# Altium PCB PCB.PcbDoc
Units mm, origin at the board's own origin, x right, y up, seen from the top; angles counter-clockwise.
Board outline 50.42 x 71.12 mm, 2 copper layers (Top Layer, Bottom Layer); 27 components, 57 nets, 214 pads, 39 vias.
Unrouted connection lines stored in the file: 4.
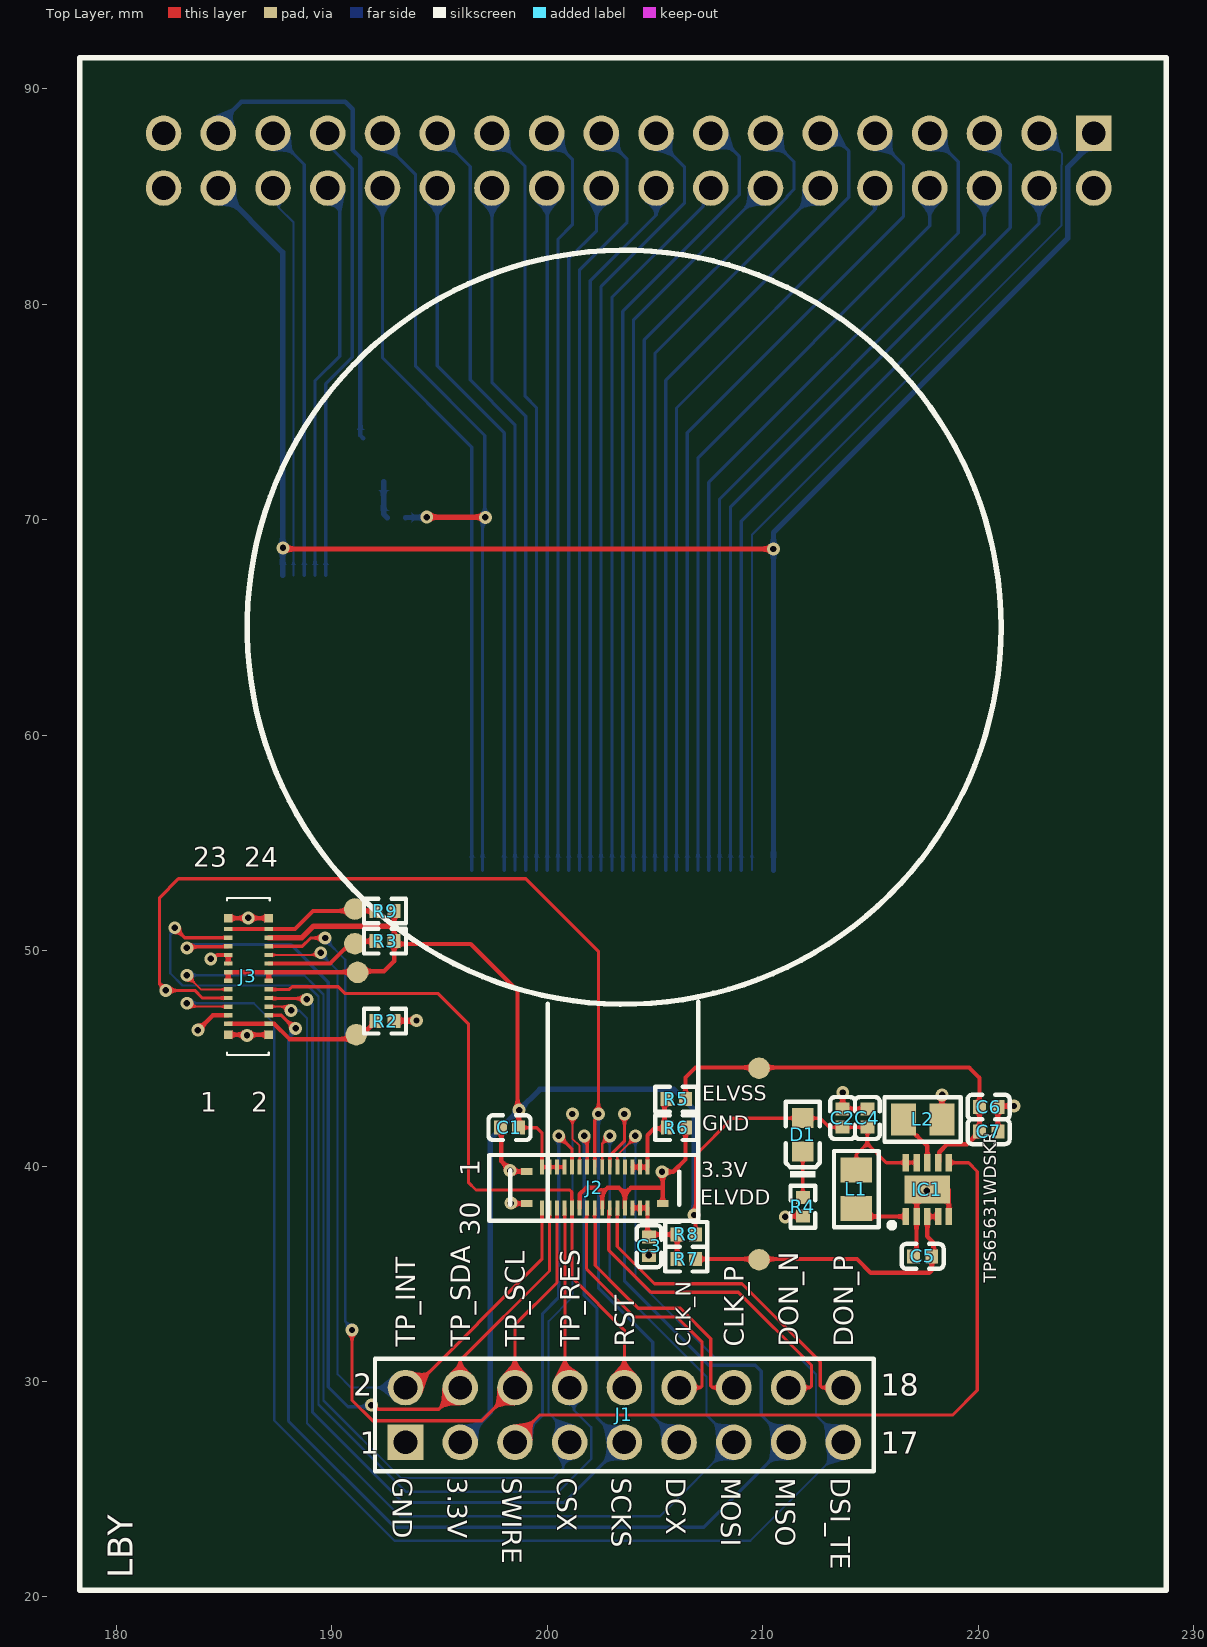
[diagram p0: Top Layer view]
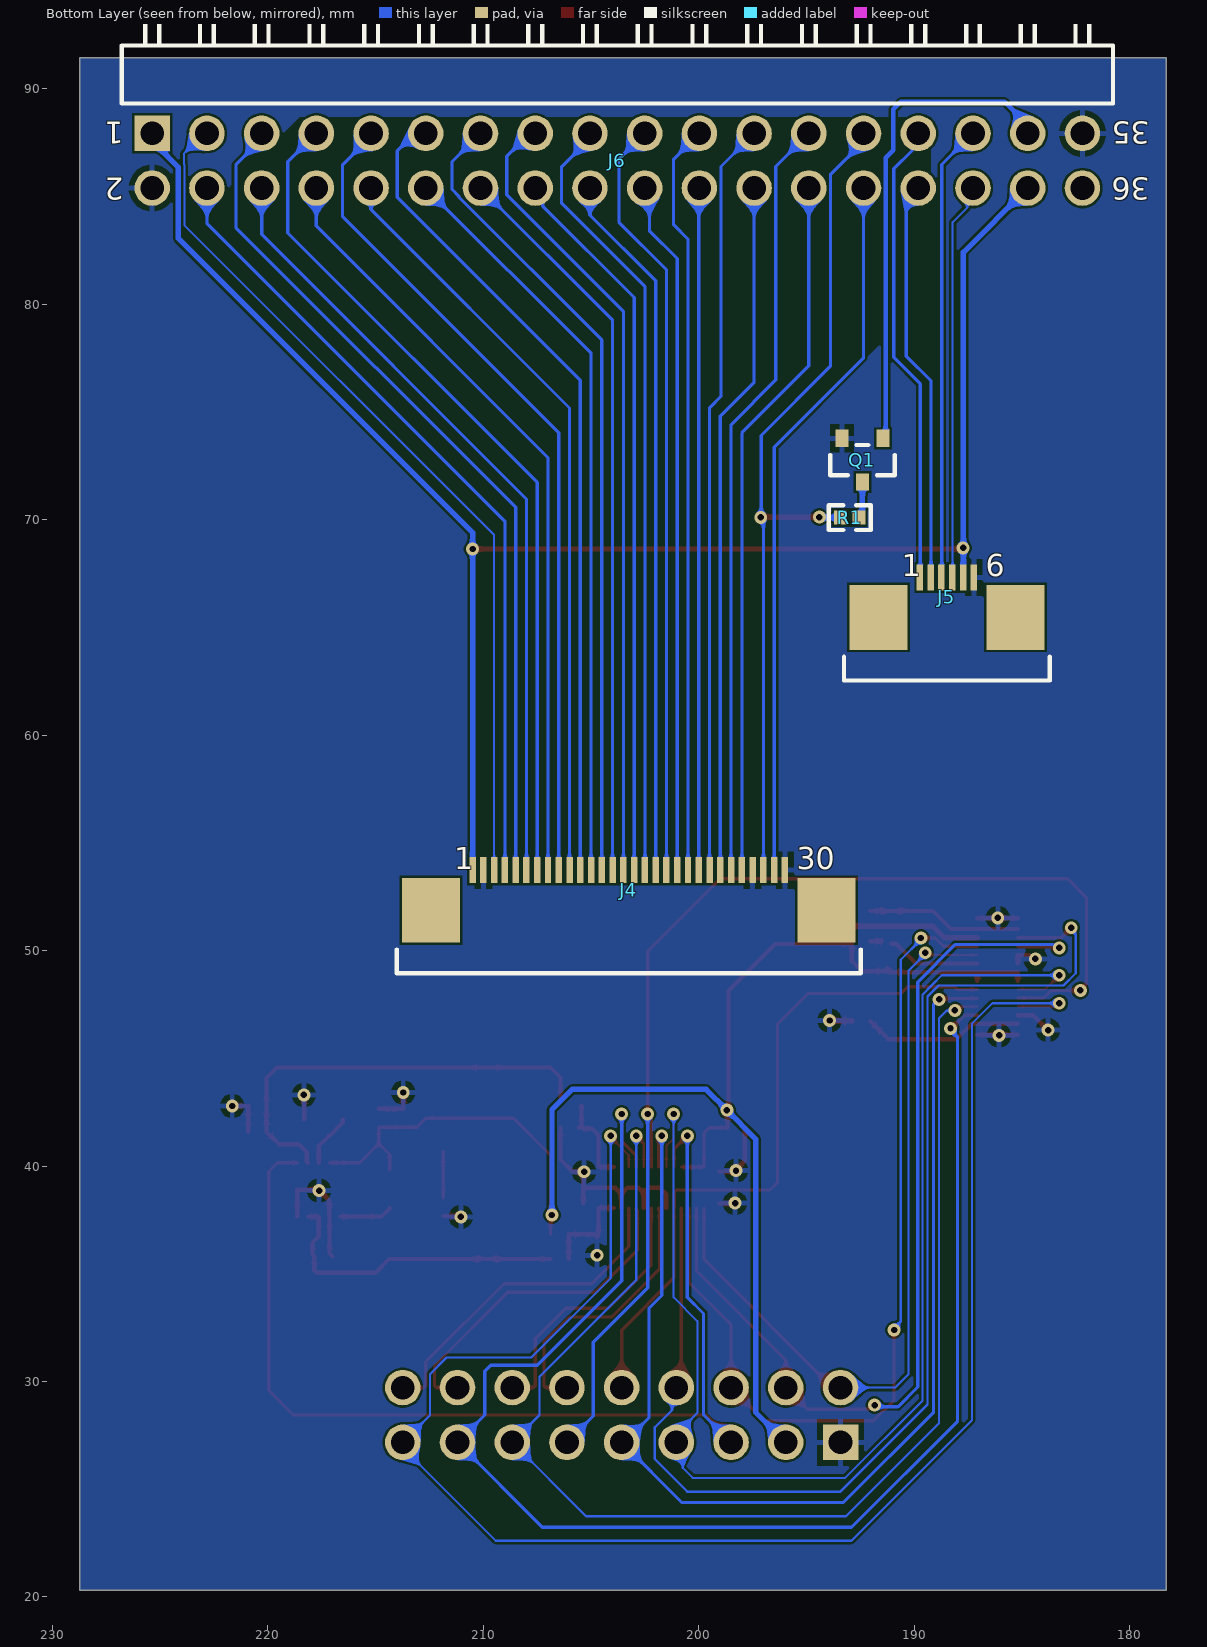
[diagram p1: Bottom Layer view, seen from below]
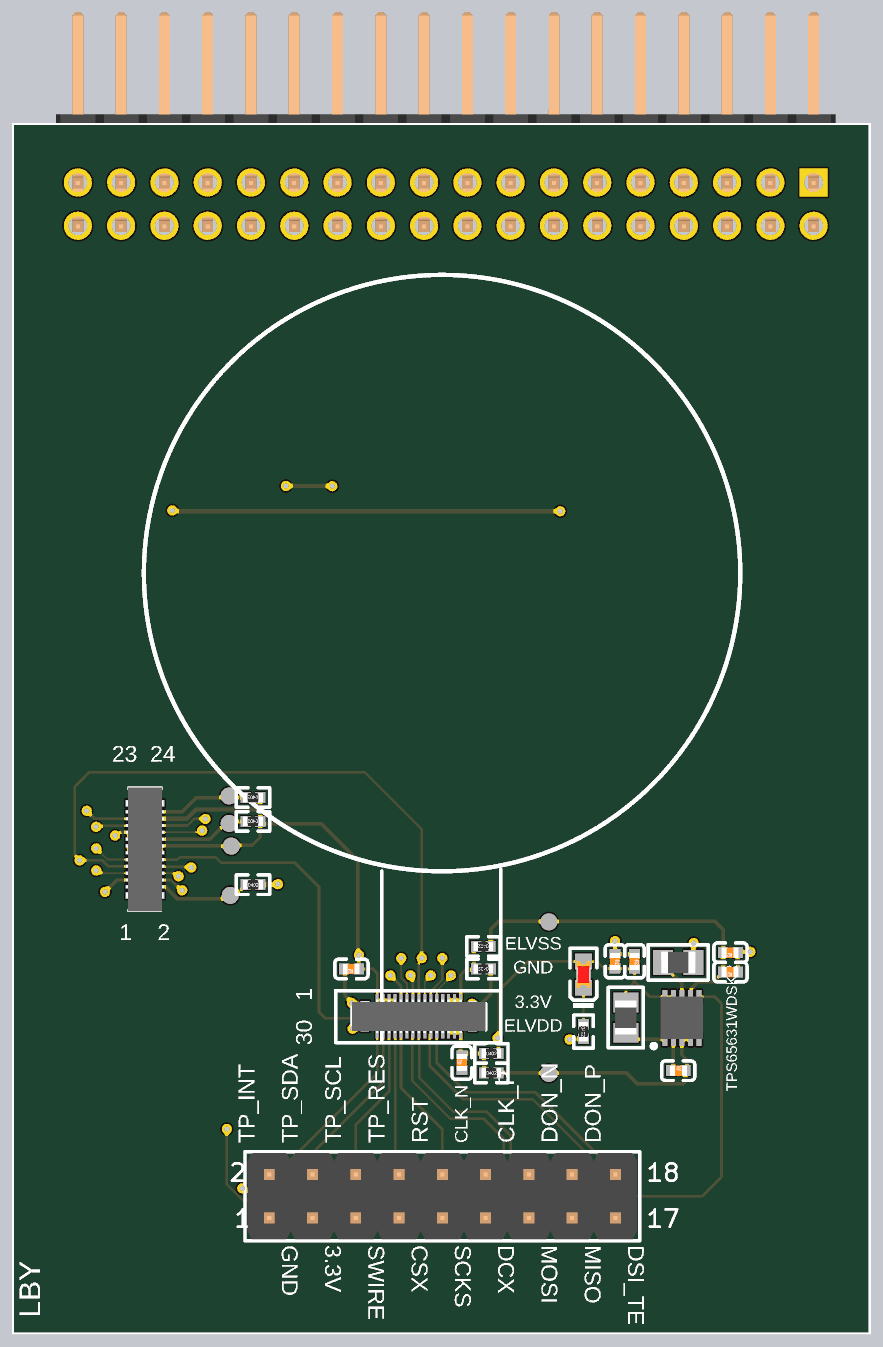
[diagram p2: 3D render of the assembled board from above, using the file's embedded part models]
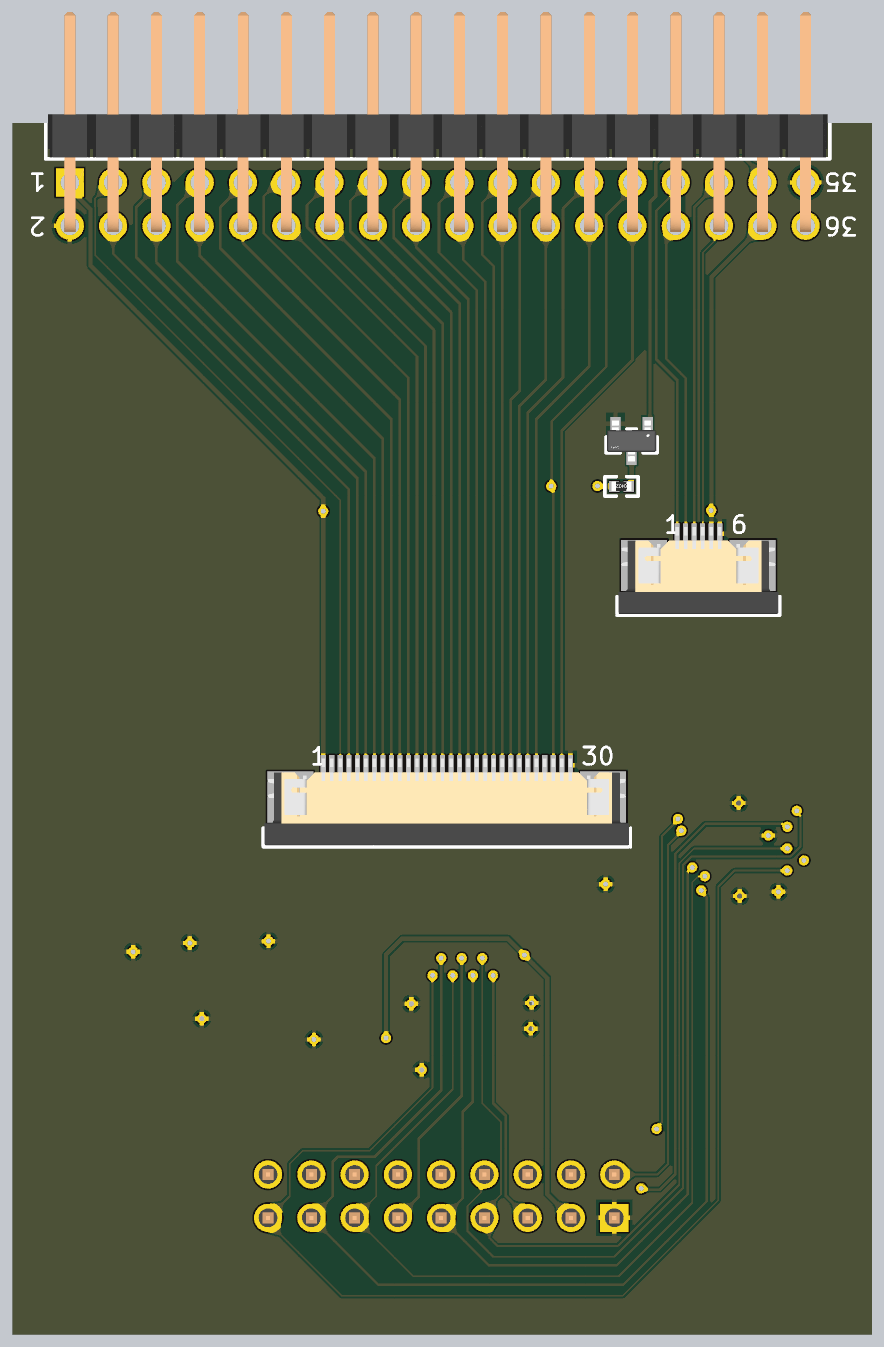
[diagram p3: 3D render of the assembled board from below, using the file's embedded part models]

## Layer stack, top to bottom
Top Solder: solder mask 0.0102, Solder Resist, Dk 3.5
Top Layer: signal copper 0.0356
Dielectric 1: dielectric 0.32, FR-4, Dk 4.8
Bottom Layer: signal copper 0.0356
Bottom Solder: solder mask 0.0102, Solder Resist, Dk 3.5

## Board outline
178.308,20.32 178.308,91.44 228.727,91.44 228.727,20.32

## Design rules (kind name [scope] priority, off if disabled: settings)
Clearance [All] p1: gap=0.102 ignorepadtopadclearanceinfootprint=FALSE
DiffPairsRouting DiffPair_DiffPairsRouting [InDifferentialPairClass('New Class')] p1: maxlimit=0.4 minlimit=0.1 mostfreqgap=0.254 toplayer_minwidth=0.15 toplayer_maxwidth=0.15 toplayer_prefwidth=0.15 bottomlayer_minwidth=0.15 bottomlayer_maxwidth=0.15 bottomlayer_prefwidth=0.15 maxuncoupledlength=12.7
DiffPairsRouting DiffPair_DiffPairsRouting_1 [InDifferentialPairClass('New Class')] p2: maxlimit=0.4 minlimit=0.15 mostfreqgap=0.254 toplayer_minwidth=0.381 toplayer_maxwidth=0.381 toplayer_prefwidth=0.381 bottomlayer_minwidth=0.381 bottomlayer_maxwidth=0.381 bottomlayer_prefwidth=0.381 maxuncoupledlength=12.7
DiffPairsRouting DiffPair_DiffPairsRouting_2 [InDifferentialPairClass('New Class')] p3: maxlimit=0.254 minlimit=0.254 mostfreqgap=0.254 toplayer_minwidth=0.15 toplayer_maxwidth=0.15 toplayer_prefwidth=0.15 bottomlayer_minwidth=0.15 bottomlayer_maxwidth=0.15 bottomlayer_prefwidth=0.15 maxuncoupledlength=12.7
DiffPairsRouting DiffPair_DiffPairsRouting_3 [InDifferentialPairClass('New Class')] p4: maxlimit=0.254 minlimit=0.254 mostfreqgap=0.254 toplayer_minwidth=0.1 toplayer_maxwidth=0.381 toplayer_prefwidth=0.15 bottomlayer_minwidth=0.1 bottomlayer_maxwidth=0.381 bottomlayer_prefwidth=0.15 maxuncoupledlength=12.7
DiffPairsRouting DiffPair_DiffPairsRouting_4 [InDifferentialPairClass('New Class')] p5: maxlimit=0.254 minlimit=0.254 mostfreqgap=0.254 toplayer_minwidth=0.381 toplayer_maxwidth=0.381 toplayer_prefwidth=0.381 bottomlayer_minwidth=0.381 bottomlayer_maxwidth=0.381 bottomlayer_prefwidth=0.381 maxuncoupledlength=12.7
DiffPairsRouting [All] p6: maxlimit=0.254 minlimit=0.254 mostfreqgap=0.254 toplayer_minwidth=0.381 toplayer_maxwidth=0.381 toplayer_prefwidth=0.381 bottomlayer_minwidth=0.381 bottomlayer_maxwidth=0.381 bottomlayer_prefwidth=0.381 maxuncoupledlength=12.7
MatchedLengths DiffPair_MatchedLengths [InDifferentialPairClass('New Class')] p1: tolerance=25.4 checknetsindiffpair=FALSE checkdiffpairvsdiffpair=TRUE checkxsignals=TRUE checkothers=TRUE
MatchedLengths DiffPair_MatchedLengths_1 [InDifferentialPairClass('New Class')] p2: tolerance=25.4 checknetsindiffpair=FALSE checkdiffpairvsdiffpair=TRUE checkxsignals=TRUE checkothers=TRUE
MatchedLengths DiffPair_MatchedLengths_2 [InDifferentialPairClass('New Class')] p3: tolerance=25.4 checknetsindiffpair=FALSE checkdiffpairvsdiffpair=TRUE checkxsignals=TRUE checkothers=TRUE
MatchedLengths DiffPair_MatchedLengths_3 [InDifferentialPairClass('New Class')] p4: tolerance=25.4 checknetsindiffpair=FALSE checkdiffpairvsdiffpair=TRUE checkxsignals=TRUE checkothers=TRUE
MatchedLengths DiffPair_MatchedLengths_4 [InDifferentialPairClass('New Class')] p5: tolerance=25.4 checknetsindiffpair=FALSE checkdiffpairvsdiffpair=TRUE checkxsignals=TRUE checkothers=TRUE
PolygonConnect [All] p1: connectstyle=Relief reliefconductorwidth=0.254 reliefentries=4 polygonreliefangle="90 Angle" airgapwidth=0.254
RoutingVias [All] p1: holewidth=0.711 width=1.27 viastyle="Through Hole" minholewidth=0.711 minwidth=1.27 maxholewidth=0.711 maxwidth=1.27
SolderMaskExpansion [All] p1: expansion=0.102 istentingtop=FALSE
Width [All] p1: maxlimit=0.254 minlimit=0.1 preferedwidth=0.254
29 further rules are at their usual default settings.

## Classes and differential pairs
component class MIAN: C1 C2 C3 C4 C5 C6 C7 D1 IC1 J1 J2 J3 J4 J5 L1 L2 Q1 R1 R3 R4 R5 R6 R7 R8 R9
differential pair DON: +DON_P -DON_N
differential pair CLK: +CLK_P -CLK_N

## Components (designator, comment, footprint, x,y, rotation, side; value= is the part's Value field where it differs from the comment)
C1 "100nF" 0402_C 198.247,41.783 r180 top value=100pF
C2 "10uF" 0402_C 213.714,42.231 r270 top
C3 "100nF" 0402_C 204.724,36.278 r90 top value=100pF
C4 "10uF" 0402_C 214.857,42.231 r270 top
C5 "10uF" 0402_C 217.424,35.814 r0 top
C6 "10uF" 0402_C 220.489,42.739 r180 top
C7 "10uF" 0402_C 220.489,41.596 r180 top
D1 "红灯 0603" 0603_LED_S1 211.863,41.454 r90 top
IC1 "TPS65631WDSKR" SON50P250X250X80-11N-D 217.643,38.909 r90 top
J1 "61301821121" 61301821121 203.581,28.448 r0 top locked
J2 "BM28B0.6-30DS_2-0.35V_53_" BM28B0630DS2035V53 202.331,39.006 r0 top
J3 "BM14B_0.8_-24DS-0.4V_53_" BM14B0824DS04V53 186.131,48.803 r90 top
J4 "68713014522" 68713014522 203.251,51.177 r180 bottom
J5 "68710614522" 68710614522 188.485,64.767 r180 bottom
J6 "61303621021" 61303621021 203.782,90.668 r0 bottom
L1 "10uH ±10%" 0805_L 214.349,38.929 r90 top
L2 "10uH ±10%" 0805_L 217.424,42.164 r0 top
Q1 "SS8050-G" FP-SS8050-G-MFG 192.405,72.771 r270 bottom
R1 "0Ω (0R0) ±1%" 0402_R 192.996,70.104 r0 bottom
R2 "0Ω (0R0) ±1%" 0402_R 192.471,46.73 r0 top
R3 "0Ω (0R0) ±1%" 0402_R 192.471,50.444 r180 top
R4 "0Ω (0R0) ±1%" 0402_R 211.863,38.108 r270 top
R5 "0Ω (0R0) ±1%" 0402_R 205.99,43.104 r180 top
R6 "0Ω (0R0) ±1%" 0402_R 205.994,41.783 r180 top
R7 "0Ω (0R0) ±1%" 0402_R 206.458,35.687 r0 top
R8 "0Ω (0R0) ±1%" 0402_R 206.458,36.83 r0 top
R9 "0Ω (0R0) ±1%" 0402_R 192.471,51.841 r180 top

## Footprints (in the part's own frame and the unit in brackets; to place one, negate y for a bottom-side part, rotate by r counter-clockwise, add the part's x,y. Pads: shape width x height; smd on the part's side, far side on the other; paste and mask are expansions set on the pad)
0402_C [mm]
  rect 0.6x0.65 smd mask+0.051: 1(-0.425,0) 2(0.425,0)
  silkscreen extent -0.97,-0.58 0.98,0.58, body extent -0.48,-0.3 0.52,0.3, height 0.2
0402_R [mm]
  rect 0.6x0.65 smd mask+0.051: 1(-0.425,0) 2(0.425,0)
  silkscreen extent -0.98,-0.58 0.98,0.57, body extent -0.58,-0.27 0.57,0.28, height 0.41
0603_LED_S1 [mm]
  rect 0.93x0.98 smd: A(0.77,0) K(-0.77,0)
  silkscreen extent -1.98,-0.79 1.54,0.79, body extent -0.8,-0.4 0.8,0.4, height 0.6
0805_L [mm]
  rect 1.16x1.47 smd: 1(-0.89,0) 2(0.89,0)
  silkscreen extent -1.77,-1.03 1.77,1.04, body extent -1.02,-0.64 1.03,0.64, height 0.6
61301821121 [mm] "Pin Header, pitch 2.54 mm, THT, Vertical, dual row, 18p"
  rect 1.65x1.65 hole 1.1: 1(-10.16,-1.27)
  round 1.65 hole 1.1: 2(-10.16,1.27) 3(-7.62,-1.27) 4(-7.62,1.27) 5(-5.08,-1.27) 6(-5.08,1.27) 7(-2.54,-1.27) 8(-2.54,1.27) 9(0,-1.27) 10(0,1.27) 11(2.54,-1.27) 12(2.54,1.27) 13(5.08,-1.27) 14(5.08,1.27) 15(7.62,-1.27) 16(7.62,1.27) 17(10.16,-1.27) 18(10.16,1.27)
  silkscreen extent -11.58,-2.62 11.58,2.62, body extent -11.43,-2.54 11.43,2.54, height 8.59
61303621021 [mm] "Pin Header, pitch 2.54 mm, THT, Angled, dual row, 36p"
  rect 1.65x1.65 hole 1.1: 1(21.59,2.73)
  round 1.65 hole 1.1: 2(21.59,5.27) 3(19.05,2.73) 4(19.05,5.27) 5(16.51,2.73) 6(16.51,5.27) 7(13.97,2.73) 8(13.97,5.27) 9(11.43,2.73) 10(11.43,5.27) 11(8.89,2.73) 12(8.89,5.27) 13(6.35,2.73) 14(6.35,5.27) 15(3.81,2.73) 16(3.81,5.27) 17(1.27,2.73) 18(1.27,5.27) 19(-1.27,2.73) 20(-1.27,5.27) 21(-3.81,2.73) 22(-3.81,5.27) 23(-6.35,2.73) 24(-6.35,5.27) 25(-8.89,2.73) 26(-8.89,5.27) 27(-11.43,2.73) 28(-11.43,5.27) 29(-13.97,2.73) 30(-13.97,5.27) 31(-16.51,2.73) 32(-16.51,5.27) 33(-19.05,2.73) 34(-19.05,5.27) 35(-21.59,2.73) 36(-21.59,5.27)
  silkscreen extent -23.01,-7.27 23.01,1.35, body extent -22.86,-7.27 22.86,5.63, height 5.12
68710614522 [mm] "ZIF Connectors, Horizontal, Bottom Contact, pitch 0.5mm, 6p"
  rect 0.3x1.2 smd: 1(-1.25,2.56) 2(-0.75,2.56) 3(-0.25,2.56) 4(0.25,2.56) 5(0.75,2.56) 6(1.25,2.56)
  rect 2.7x3 smd: MP1(-3.18,0.7) MP2(3.18,0.7)
  silkscreen extent -4.77,-2.22 4.77,-1.12, body extent -4.7,-2.15 4.7,2.95, height 2.1
68713014522 [mm] "ZIF Connectors, Horizontal, Bottom Contact, pitch 0.5mm, 30p"
  rect 0.3x1.2 smd: 1(-7.25,2.56) 2(-6.75,2.56) 3(-6.25,2.56) 4(-5.75,2.56) 5(-5.25,2.56) 6(-4.75,2.56) 7(-4.25,2.56) 8(-3.75,2.56) 9(-3.25,2.56) 10(-2.75,2.56) 11(-2.25,2.56) 12(-1.75,2.56) 13(-1.25,2.56) 14(-0.75,2.56) 15(-0.25,2.56) 16(0.25,2.56) 17(0.75,2.56) 18(1.25,2.56) 19(1.75,2.56) 20(2.25,2.56) 21(2.75,2.56) 22(3.25,2.56) 23(3.75,2.56) 24(4.25,2.56) 25(4.75,2.56) 26(5.25,2.56) 27(5.75,2.56) 28(6.25,2.56) 29(6.75,2.56) 30(7.25,2.56)
  rect 2.7x3 smd: MP1(-9.18,0.7) MP2(9.18,0.7)
  silkscreen extent -10.77,-2.22 10.78,-1.12, body extent -10.7,-2.15 10.7,2.95, height 2.1
BM14B0824DS04V53 [mm]
  rect 0.2x0.4 smd: 1(-2.2,0.94) 2(-2.2,-0.94) 3(-1.8,0.94) 4(-1.8,-0.94) 5(-1.4,0.94) 6(-1.4,-0.94) 7(-1,0.94) 8(-1,-0.94) 9(-0.6,0.94) 10(-0.6,-0.94) 11(-0.2,0.94) 12(-0.2,-0.94) 13(0.2,0.94) 14(0.2,-0.94) 15(0.6,0.94) 16(0.6,-0.94) 17(1,0.94) 18(1,-0.94) 19(1.4,0.94) 20(1.4,-0.94) 21(1.8,0.94) 22(1.8,-0.94) 23(2.2,0.94) 24(2.2,-0.94)
  rect 0.41x0.4 smd: MP1(-2.705,0.94) MP2(-2.705,-0.94) MP3(2.705,-0.94) MP4(2.705,0.94)
  silkscreen extent -3.64,-0.99 3.64,0.99, body extent -3.64,-1.12 3.64,1.12, height 0.9
BM28B0630DS2035V53 [mm]
  rect 0.18x0.7 smd: 1(-2.577,0.95) 2(-2.577,-0.95) 3(-2.227,0.95) 4(-2.227,-0.95) 5(-1.877,0.95) 6(-1.877,-0.95) 7(-1.527,0.95) 8(-1.527,-0.95) 9(-1.177,0.95) 10(-1.177,-0.95) 11(-0.827,0.95) 12(-0.827,-0.95) 13(-0.477,0.95) 14(-0.477,-0.95) 15(-0.127,0.95) 16(-0.127,-0.95) 17(0.223,0.95) 18(0.223,-0.95) 19(0.573,0.95) 20(0.573,-0.95) 21(0.923,0.95) 22(0.923,-0.95) 23(1.273,0.95) 24(1.273,-0.95) 25(1.623,0.95) 26(1.623,-0.95) 27(1.973,0.95) 28(1.973,-0.95) 29(2.323,0.95) 30(2.323,-0.95)
  rect 0.53x0.31 smd: MP1(-3.282,0.745) MP2(-3.282,-0.745) MP3(3.028,-0.745) MP4(3.028,0.745)
  silkscreen extent -4.05,-0.8 3.8,0.79, body extent -4.05,-0.98 3.8,0.98, height 0.7
FP-SS8050-G-MFG [mm]
  rect 0.8x0.6 smd paste+0 mask+0: 1(-1.01,0.95) 2(-1.01,-0.95) 3(1.01,0)
  silkscreen extent -0.7,-1.5 0.7,1.5, body extent -1.21,-1.45 1.21,1.45, height 1.15
SON50P250X250X80-11N-D [mm]
  rect 0.8x0.3 smd: 1(-1.25,1) 2(-1.25,0.5) 3(-1.25,0) 4(-1.25,-0.5) 5(-1.25,-1) 6(1.25,-1) 7(1.25,-0.5) 8(1.25,0) 9(1.25,0.5) 10(1.25,1)
  rect 1.3x2.1 smd: 11(0,0)
  silkscreen extent -1.77,1.53 -1.53,1.77, body extent -1.25,-1.25 1.25,1.25, height 0.77

## Part data
C1 C3: library part CAP, "Capacitor", Published=8-Jun-2000, Publisher="Altium Limited", Revision="July-2002: Re-released for DXP Platform."
C2 C4 C5 C6 C7: library part "0402 10uF (106) 20% 6.3V", "贴片电容", Package=0402, SuppliersPartNumber=C15525, ComponentLink1Description=供应商链接, ComponentLink1URL=http://www.szlcsc.com/product/details_16204.html, Supplier=LC
D1: library part "0603 红灯", "发光二极管", Package=0603, SuppliersPartNumber=C2286, ComponentLink1Description=供应商链接, ComponentLink1URL=http://www.szlcsc.com/product/details_2659.html, Supplier=LC
IC1: "Integrated Circuit", Manufacturer_Name="Texas Instruments", Mouser Part Number=595-TPS65631WDSKR, Arrow Part Number=TPS65631WDSKR, Arrow Price/Stock=https://www.arrow.com/en/products/tps65631wdskr/texas-instruments, Datasheet Link=http://www.ti.com/lit/gpn/tps65631w, Height=0.8mm, Manufacturer_Part_Number=TPS65631WDSKR, Mouser Price/Stock=https://www.mouser.co.uk/ProductDetail/Texas-Instruments/TPS65631WDSKR?qs=6E8igxPflKf9wUn%252Bq%252B8X1Q%3D%3D
J1: library part CMP-1502-01101-1, "THT Vertical Pin Header WR-PHD, Pitch 2.54 mm, Dual Row, 18 pins", Contact Resistance=20mOhm, Manufacturer="Wurth Elektronik", Operating Temperature=-40to105degC, Rated Current=3A, Withstanding Voltage=500VAC, Working Voltage=250VAC, Datasheet URL=https://katalog.we-online.de/em/datasheet/6130xx21121.pdf, Gender=Male, Manufacturer URL=http://www.we-online.de, Mounting Technology=THT, Orientation=Vertical, Package Reference=61301821121, Packaging=Bag, PART NUMBER=61301821121, Pin Number=18, Pitch=2.54mm, Publisher=WurthElektronik, Row Number=Dual
J2: "Connector", Manufacturer_Name=Hirose, Manufacturer_Part_Number=BM28B0.6-30DS/2-0.35V(53), Mouser Part Number=798-28B0630DS2035V53, Datasheet Link=https://datasheet.datasheetarchive.com/originals/distributors/DKDS-30/589689.pdf, Height=0.6mm, Mouser Price/Stock=https://www.mouser.co.uk/ProductDetail/Hirose-Connector/BM28B06-30DS-2-035V53?qs=1mbolxNpo8dyGYNDVauvGQ%3D%3D
J3: "Connector", Arrow Part Number=BM14B(0.8)-24DS-0.4V(53), Manufacturer_Name=Hirose, Mouser Part Number=798-BM14B0824DS04V53, Arrow Price/Stock=https://www.arrow.com/en/products/bm14b-0.8-24ds-0.4v-53/hirose-electric, Datasheet Link=https://www.arrow.com/en/products/bm14b-0.8-24ds-0.4v-53/hirose-electric, Height=0.8mm, Manufacturer_Part_Number=BM14B(0.8)-24DS-0.4V(53), Mouser Price/Stock=https://www.mouser.co.uk/ProductDetail/Hirose-Connector/BM14B08-24DS-04V53?qs=QRVci0nWsCaR3TeKMbLD%252Bw%3D%3D
J4: library part CMP-1502-01540-1, "SMT ZIF Connectors WR-FPC, Horizontal, Bottom Contact, pitch 0.5 mm, 30 pins", Contact Resistance=20mOhm, Manufacturer="Wurth Elektronik", Operating Temperature=-25to85degC, Rated Current=0.5A, Withstanding Voltage=250VAC, Working Voltage=50VAC, Contact Design=BottomContact, Datasheet URL=https://katalog.we-online.de/em/datasheet/68713014522.pdf, Manufacturer URL=http://www.we-online.de, Mounting Technology=SMT, Orientation=Horizontal, Package Reference=68713014522, Packaging=TapeandReel, PART NUMBER=68713014522, Pin Number=30, Pitch=0.5mm, Publisher=WurthElektronik
J5: library part CMP-1502-01527-1, "SMT ZIF Connectors WR-FPC, Horizontal, Bottom Contact, pitch 0.5 mm, 6 pins", Contact Resistance=20mOhm, Manufacturer="Wurth Elektronik", Operating Temperature=-25to85degC, Rated Current=0.5A, Withstanding Voltage=250VAC, Working Voltage=50VAC, Contact Design=BottomContact, Datasheet URL=https://katalog.we-online.de/em/datasheet/68710614522.pdf, Manufacturer URL=http://www.we-online.de, Mounting Technology=SMT, Orientation=Horizontal, Package Reference=68710614522, Packaging=TapeandReel, PART NUMBER=68710614522, Pin Number=6, Pitch=0.5mm, Publisher=WurthElektronik
J6: library part CMP-1502-01130-1, "THT Angled Pin Header WR-PHD, Pitch 2.54 mm, Dual Row, 36 pins", Contact Resistance=20mOhm, Manufacturer="Wurth Elektronik", Operating Temperature=-40to105degC, Rated Current=3A, Withstanding Voltage=500VAC, Working Voltage=250VAC, Datasheet URL=https://katalog.we-online.de/em/datasheet/6130xx21021.pdf, Gender=Male, Manufacturer URL=http://www.we-online.de, Mounting Technology=THT, Orientation=Angled, Package Reference=61303621021, Packaging=Bag, PART NUMBER=61303621021, Pin Number=36, Pitch=2.54mm, Publisher=WurthElektronik, Row Number=Dual
L1 L2: library part "0805 10uH 10%", "贴片电感", Package=0805, SuppliersPartNumber=C1046, ComponentLink1Description=供应商链接, ComponentLink1URL=http://www.szlcsc.com/product/details_1398.html, Supplier=LC
Q1: library part CMP-20235-000001-1, "NPN TRANSISTOR 1.5A 40V SOT-23 R", Case/Package=TO-236-3, Collector Emitter Breakdown Voltage=25V, Collector Emitter Voltage (VCEO)=400mV, Max Collector Current=1.5A, Max Power Dissipation=300mW, Transition Frequency=100MHz, Max Breakdown Voltage=25V, Mount="Surface Mount", Packaging="Tape and Reel", RoHS Compliant=Yes
R1 R2 R3 R4 R5 R6 R7 R8 R9: library part "0402 0Ω (0R0) 1%", "贴片电阻", Package=0402, SuppliersPartNumber=C17168, ComponentLink1Description=供应商链接, ComponentLink1URL=http://www.szlcsc.com/product/details_17853.html, Supplier=LC

## Free pads (board coordinates)
  round 1 smd: 1(191.067,51.934) 1(191.071,50.325) 1(191.135,46.101) 1(191.198,48.993) 1(209.833,35.656) 1(209.833,44.546)

## Via types
v1: diameter 0.6, hole 0.3, Top Layer to Bottom Layer, 39 vias

## Nets (pads, with @x,y where several pads share a name; then routed paths per layer and width w, separated by ;. In a path a pad name is that pad's centre, name@x,y a point inside that pad or via, vN(x,y) a via of type N, cw(c..) or ccw(c..) an arc to the next point about the centre after c; other vN are vias at no path point)
3V3: C1.1 C2.2 C4.2 D1.A IC1.9 IC1.10 J1.3 J2.1 J2.3 J2.5 J2.7 J3.11 J3.12 J3.13 J3.14 J3.22 L1.2 pad.1@191.198,48.993 R3.1 R8.2 R9.1 | length 81.9
  Top Layer w0.15: C1.1 199.517,41.783 199.754,41.546 J2.1 J2.7 ; R8.2 206.883,40.513 208.594,42.224 D1.A 212.665,42.224 213.083,41.806 C2.2 C4.2 214.857,41.048 ; L1.2 214.349,40.54 214.857,41.048 ; IC1.9 IC1.10 215.746,40.159 214.857,41.048
  Top Layer w0.2: J3.11 J3.13 186.971,49.003 J3.14 ; J3.12 J3.14 ; pad.1@191.156,49.146 191.18,49.003 J3.14 ; pad.1@191.198,48.993 191.252,49.047 192.427,49.047 192.896,49.516 R3.1@192.896,50.309 ; pad.1@191.24,49.16 191.258,49.177 pad.1@191.32,49.115 ; R9.1 192.896,51.143 R3.1 R3.1@192.896,50.309 ; C1.1 198.672,42.596 198.619,42.649 198.619,48.142 196.452,50.309 R3.1@192.896,50.309
  Top Layer w0.25: J3.22 188.61,50.603 189.149,51.143 192.896,51.143
  Bottom Layer w0.25: J1.3 197.358,28.575 197.358,41.259 v1(198.696,42.596) 199.66,43.561 205.878,43.561 206.816,42.623 v1(206.816,37.731)
BL_CTR: J6.33 Q1.1 | length 22.7
  Bottom Layer w0.2: J6.33 184.732,88.339 185.801,89.408 190.627,89.408 190.976,89.059 190.976,87.154 191.325,86.805 191.325,73.911 Q1.1
CLK_N: J1.12 J2.14 | length 12.7
  Top Layer w0.15: J2.14 201.854,37.949 201.827,37.922 201.827,35.219 202.914,34.131 204.049,32.997 206.017,32.997 207.189,31.825 207.189,29.806 207.101,29.718 J1.12
CLK_P: J1.14 J2.16 | length 12.7
  Top Layer w0.15: J2.16 202.204,37.468 202.231,37.441 202.231,35.386 203.486,34.131 204.216,33.401 206.184,33.401 207.593,31.992 207.593,29.806 207.681,29.718 J1.14
CSX: J1.7 J2.11 J3.9 J4.3 J6.3 | length 101.3
  Top Layer w0.1: v1@183.348,48.858 v1(183.269,48.858) 183.923,48.203 J3.9 ; v1(201.168,42.418) 201.168,41.275 201.504,40.939 J2.11
  Bottom Layer w0.1: v1(183.269,48.858) 188.722,48.858 189.199,48.38 189.611,47.969 189.611,29.124 193.208,25.527 200.279,25.527 200.744,25.992 200.744,27.262 201.041,27.559 200.064,28.536 200.064,32.805 201.168,33.909 v1(201.168,42.418) ; J4.3 209.501,69.293 223.878,83.67 223.878,86.475 223.901,86.497 223.901,86.995 222.958,87.938 J6.3
D0: J4.6 J6.6 | length 36.8
  Bottom Layer w0.15: J4.6 208.001,70.968 220.292,83.259 J6.6
D1: J4.7 J6.7 | length 39.5
  Bottom Layer w0.15: J4.7 207.501,71.738 219.075,83.312 219.075,86.615 J6.7
D2: J4.8 J6.8 | length 36.1
  Bottom Layer w0.15: J4.8 207.001,72.889 217.752,83.64 J6.8
D3: J4.9 J6.9 | length 38.9
  Bottom Layer w0.15: J4.9 206.501,74.04 216.535,84.074 216.535,86.487 215.212,87.81 J6.9
D4: J4.10 J6.10 | length 35.5
  Bottom Layer w0.15: J4.10 206.001,75.191 215.212,84.402 J6.10
D5: J4.11 J6.11 | length 38.6
  Bottom Layer w0.15: J4.11 205.501,76.469 213.995,84.963 213.995,87.122 213.179,87.938 J6.11
D6: J4.12 J6.12 | length 34.8
  Bottom Layer w0.15: J4.12 205.001,77.727 J6.12
D7: J4.13 J6.13 | length 37.6
  Bottom Layer w0.15: J4.13 204.501,78.35 211.134,84.983 211.134,85.023 211.455,85.344 211.455,86.615 J6.13
D8: J4.14 J6.14 | length 34.2
  Bottom Layer w0.15: J4.14 204.001,79.267 J6.14
D9: J4.15 J6.15 | length 37.1
  Bottom Layer w0.15: J4.15 203.501,79.676 208.915,85.09 208.915,86.868 207.845,87.938 J6.15
D10: J4.16 J6.16 | length 33.6
  Bottom Layer w0.15: J4.16 203.001,80.319 207.244,84.562 207.244,84.644 207.592,84.992 J6.16
D11: J4.17 J6.17 | length 36.4
  Bottom Layer w0.15: J4.17 202.501,80.835 206.375,84.709 206.375,86.36 205.052,87.683 J6.17
D12: J4.18 J6.18 | length 32.9
  Bottom Layer w0.15: J4.18 202.001,81.097 205.052,84.148 J6.18
D13: J4.19 J6.19 | length 35.6
  Bottom Layer w0.15: J4.19 201.501,81.613 203.708,83.82 203.708,86.742 J6.19
D14: J4.20 J6.20 | length 32.3
  Bottom Layer w0.15: J4.20 201.001,82.129 202.292,83.42 202.292,85.178 J6.20
D15: J4.21 J6.21 | length 35
  Bottom Layer w0.15: J6.21 201.168,86.742 201.168,83.693 200.501,83.026 J4.21
DCX: J1.11 J2.15 J3.7 | length 56.6
  Top Layer w0.15: v1@182.351,48.214 v1(182.291,48.155) ; J3.7 183.984,47.803 183.633,48.155 v1(182.291,48.155) ; J2.15 202.204,42.126 202.374,42.296 v1(202.374,42.418) 202.374,49.974 199.009,53.34 182.88,53.34 182.005,52.465 182.005,48.467 182.291,48.182 v1(182.291,48.155)
  Bottom Layer w0.15: v1(202.374,42.418) 202.374,34.353 204.898,31.83 204.898,28.401 J1.11
DE: J4.22 J6.22 | length 31.7
  Bottom Layer w0.15: J6.22 200.001,85.37 J4.22
DON_N: J1.16 J2.20 | length 15.7
  Top Layer w0.15: J2.20 202.904,37.987 202.85,37.933 202.85,36.101 204.811,34.14 208.875,34.14 212.269,30.746 212.269,29.806 212.181,29.718 J1.16
DON_P: J1.18 J2.22 | length 15.6
  Top Layer w0.15: J2.22 203.254,36.268 204.978,34.544 209.042,34.544 212.673,30.913 212.673,29.806 212.761,29.718 J1.18
DOTCLK: J4.23 J6.23 | length 35.1
  Bottom Layer w0.15: J6.23 198.97,86.4 198.97,75.731 199.501,75.2 J4.23
DSI_RST: J1.10 J2.10 J3.10 | length 32.5
  Top Layer w0.15: J3.10 188.03,48.203 188.153,48.326 190.307,48.326 190.627,48.006 194.945,48.006 196.342,46.609 196.342,39.243 196.694,38.891 201.051,38.891 201.139,38.803 201.139,38.071 J2.10 201.154,34.812 203.581,32.385 J1.10
DSI_TE: J1.17 J2.21 J3.5 | length 78
  Top Layer w0.1: v1(183.269,47.56) 183.269,47.446 183.312,47.403 J3.5 ; J2.21 203.254,40.501 204.089,41.336 v1(204.089,41.402)
  Bottom Layer w0.1: v1(183.269,47.56) 186.374,47.56 187.325,46.609 187.325,28.194 192.913,22.606 209.423,22.606 213.741,26.924 J1.17 212.471,28.448 212.471,30.353 211.709,31.115 207.772,31.115 204.089,34.798 v1(204.089,41.402)
ELVDD: C5.2 IC1.3 IC1.4 pad.1@209.833,35.656 R7.2 | length 14.4
  Top Layer w0.2: R7.2 214.376,35.687 215.011,35.052 217.732,35.052 217.849,35.169 C5.2 217.932,35.897 217.932,36.449 217.643,36.738 IC1.3 IC1.4
ELVSS: C6.2 C7.2 IC1.7 pad.1@209.833,44.546 R5.1 | length 20.3
  Top Layer w0.2: R5.1 206.415,44.109 206.883,44.577 209.833,44.577 219.583,44.577 220.064,44.096 C6.2 C7.2 220.064,41.571 219.864,41.371 219.839,41.371 219.489,41.021 218.567,41.021 218.193,40.647 218.193,40.209 IC1.7
GND: C1.2 C2.1 C3.1 C4.1 C5.1 C6.1 C7.1 IC1.2 IC1.5 IC1.11 J1.1 J2.12 J2.18 J2.24 J2.MP1 J2.MP2 J2.MP3 J2.MP4 J3.3 J3.15 J3.17 J3.MP1 J3.MP2 J3.MP3 J3.MP4 J4.2 J4.27 J4.30 J5.6 J6.2 J6.35 L2.2 Q1.2 R2.2 R4.2 R6.1 | length 33.7
  Top Layer w0.2: v1(183.785,46.308) 184.48,47.003 J3.3 ; v1(184.379,49.615) 184.488,49.615 184.676,49.803 J3.17 J3.15 ; J3.MP1 J3.MP2 ; J3.MP4 J3.MP3 ; C1.2 197.866,41.783 197.866,40.232 198.272,39.826 v1(198.272,39.79) 198.272,39.751 J2.MP1 ; v1(198.315,38.278) 198.315,38.261 J2.MP2 ; J2.12 201.504,38.69 201.803,38.989 202.311,38.989 202.554,38.746 ; J2.18 202.554,38.746 ; J2.24 203.604,38.712 ; J2.MP3 205.359,38.983 ; R6.1 206.419,40.303 205.852,39.736 v1(205.328,39.736) 205.359,39.705 205.359,38.983 ; v1(211.048,37.644) 211.048,37.683 R4.2 ; v1(213.719,43.417) 213.714,43.417 C2.1 C4.1 ; C5.1 217.143,35.958 IC1.2 217.152,37.668 217.152,38.418 IC1.11 218.643,38.909 IC1.5 ; L2.2 218.314,43.303 v1(218.331,43.303) ; C7.1 C6.1 220.914,42.789 v1(221.656,42.789) ; 202.554,38.746 202.797,38.989 203.327,38.989 203.604,38.712 ; 203.604,38.712 203.881,38.989 205.353,38.989 205.359,38.983
  Top Layer w0.254: R2.2 192.91,46.745 193.916,46.745 v1(193.931,46.759)
  other v1: 204.72,35.861 217.625,38.864 186.063,46.064 186.122,51.523
GVDD: J3.16 pad.1@191.071,50.325 R3.2 | length 4.9
  Top Layer w0.2: J3.16 189.922,49.403 190.592,50.073 190.602,50.073 190.854,50.325 pad.1@191.071,50.325 ; pad.1@191.499,50.444 R3.2
HSYNC: J4.24 J6.24 | length 32.3
  Bottom Layer w0.15: J6.24 197.432,76.38 199.001,74.811 J4.24
LED_A: J4.29 J6.28 | length 33.4
  Bottom Layer w0.15: J6.28 192.352,77.523 196.501,73.374 J4.29
LED_K: J4.28 J6.27 R1.2 | length 39.7
  Top Layer w0.254: v1(194.407,70.127) 197.115,70.127 v1(197.125,70.117)
  Bottom Layer w0.15: J6.27 192.352,87.556 193.89,86.018 193.89,77.128 197.104,73.914 197.104,70.138 v1(197.125,70.117) 197.125,69.995 197.001,69.87 J4.28
  Bottom Layer w0.254: R1.2 193.424,70.107 v1@194.198,70.107
LEDA: J3.23 J3.24 pad.1@191.067,51.934 R9.2 | length 7.2
  Top Layer w0.2: J3.23 J3.24 188.29,51.003 189.128,51.841 R9.2
LEDK1: J3.1 J3.2 pad.1@191.135,46.101 R2.1 | length 7.5
  Top Layer w0.2: J3.1 J3.2 187.331,46.603 188.04,45.894 191.209,45.894 R2.1
NetC3_2: C3.2 J2.26 J2.28 J2.30 R7.1 R8.1 | length 4.6
  Top Layer w0.2: J2.26 J2.30 204.654,36.773 C3.2 204.851,36.83 R8.1 R7.1
NetD1_K: D1.K R4.1 | length 2.2
  Top Layer w0.15: R4.1 D1.K
NetIC1_1: IC1.1 L1.1 | length 2.5
  Top Layer w0.2: L1.1 214.729,37.659 IC1.1
NetIC1_8: IC1.8 L2.1 | length 2.5
  Top Layer w0.2: L2.1 216.534,42.009 217.141,41.402 217.17,41.402 217.643,40.929 IC1.8
NetJ2_25: J2.25 J2.27 J2.29 R5.2 R6.2 | length 4.3
  Top Layer w0.2: J2.25 J2.27 J2.29 204.654,41.436 204.957,41.739 205.369,41.739 205.428,41.798 205.442,41.798 R5.2@205.442,42.799 ; R6.2@205.374,41.798 205.554,41.798 R6.2
NetQ1_3: Q1.3 R1.1 | length 1.7
  Bottom Layer w0.254: Q1.3 192.405,70.27 R1.1
RST: J4.26 J6.26 | length 32.9
  Bottom Layer w0.15: J6.26 194.892,77.142 198.001,74.033 J4.26
SCL: J4.4 J6.4 | length 37.4
  Bottom Layer w0.15: J4.4 209.001,69.936 222.832,83.767 J6.4
SDA: J4.5 J6.5 | length 40.1
  Bottom Layer w0.15: J4.5 208.501,70.579 221.488,83.566 221.488,86.487 220.292,87.683 J6.5
SPI1_MISO: J1.15 J2.19 J3.4 | length 69.1
  Top Layer w0.15: J3.4 187.655,47.003 188.263,46.395 v1(188.316,46.395) ; J2.19 202.904,40.471 203.581,41.148 v1(203.581,42.418)
  Bottom Layer w0.15: v1(188.316,46.395) 188.316,46.306 187.99,45.979 187.99,28.164 192.913,23.241 207.264,23.241 J1.15 209.931,28.448 209.931,30.48 209.66,30.751 207.501,30.751 203.581,34.671 v1(203.581,42.418)
SPI1_MOSI: J1.13 J2.17 J3.6 | length 62
  Top Layer w0.1: J3.6 187.929,47.403 v1(188.108,47.224) ; J2.17 202.554,41.052 v1(202.904,41.402)
  Bottom Layer w0.1: v1(188.108,47.224) 188.116,47.217 188.5,47.217 188.849,46.867 188.849,28.067 193.167,23.749 205.232,23.749 J1.13 207.391,28.448 207.391,30.226 202.904,34.713 v1(202.904,41.402)
SPI1_SCK: J1.9 J2.13 J3.8 | length 55
  Top Layer w0.15: J3.8 187.096,47.778 188.808,47.778 v1(188.846,47.74) ; v1(201.718,41.402) 201.718,41.28 201.854,41.145 J2.13
  Bottom Layer w0.15: v1(188.846,47.74) 188.882,47.74 189.103,47.519 189.103,28.575 193.294,24.384 200.787,24.384 J1.9 203.454,27.178 202.311,28.321 202.311,33.401 201.718,33.994 v1(201.718,41.402)
SWIRE: IC1.6 J1.5 J2.9 | length 51
  Top Layer w0.15: J1.5 198.501,27.305 199.644,28.448 218.821,28.448 219.964,29.591 219.964,39.751 219.556,40.159 IC1.6 ; v1(200.533,41.402) 201.154,40.781 J2.9
  Bottom Layer w0.15: J1.5 199.783,28.46 199.783,33.159 200.533,33.909 v1(200.533,41.402)
TP_INT: J1.2 J2.2 J3.18 J5.4 J6.32 | length 55.3
  Top Layer w0.1: J3.18 189.076,49.803 189.081,49.809 189.391,49.809 v1(189.487,49.905)
  Top Layer w0.15: J1.2 193.802,29.718 199.754,35.67 J2.2
  Bottom Layer w0.1: J6.32 187.543,85.127 187.543,84.491 188.218,83.816 J5.4@188.218,67.417 ; v1(189.487,49.905) 189.487,49.847 190.268,49.065 190.268,30.341 190.891,29.718 J1.2
TP_RES: J1.8 J2.8 J3.21 | length 58.3
  Top Layer w0.15: v1(182.711,51.065) 183.173,50.603 J3.21 ; J2.8 200.819,38.041 200.819,29.94 J1.8
  Bottom Layer w0.11: v1(182.711,51.065) 182.711,50.967 182.499,50.755 182.499,48.953 183.071,48.381 188.878,48.381 189.105,48.154 189.384,47.875 189.384,28.929 193.421,24.892 200.533,24.892 202.043,26.402 202.043,27.871 201.246,28.668 201.246,29.513 J1.8
TP_RST: J5.1 J6.29 | length 21.5
  Bottom Layer w0.15: J5.1@189.718,67.417 189.718,76.307 190.949,77.538 190.949,86.292 190.099,87.142 190.099,87.651 J6.29
TP_SCL: J1.6 J2.6 J3.20 J5.2 J6.30 | length 61.2
  Top Layer w0.15: J3.20 188.636,50.203 189.022,50.589 v1(189.687,50.589) ; v1(190.937,32.393) 190.937,29.136 191.894,28.18 196.963,28.18 J1.6 198.501,32.639 200.454,34.592 J2.6
  Bottom Layer w0.1: v1(189.687,50.589) 189.687,50.52 190.624,49.584 190.624,32.786 190.937,32.473 v1(190.937,32.393)
  Bottom Layer w0.15: J5.2@189.218,67.417 189.218,76.442 190.373,77.597 190.373,84.837 J6.30
TP_SDA: J1.4 J2.4 J3.19 J5.3 J6.31 | length 66.3
  Top Layer w0.15: v1(183.269,50.126) 183.32,50.178 185.166,50.178 J3.19 ; v1(191.84,28.907) 191.962,28.907 192.153,28.716 194.959,28.716 J1.4 195.961,30.988 200.104,35.131 J2.4
  Bottom Layer w0.15: v1(183.269,50.126) 183.39,50.126 183.556,50.292 188.087,50.292 189.838,48.541 189.838,29.745 190.75,28.833 191.766,28.833 v1(191.84,28.907) ; J6.31 188.718,86.492 J5.3@188.718,67.417
VCC: J4.1 J5.5 J6.1 J6.34 | length 82.4
  Top Layer w0.25: v1(187.735,68.695) 187.785,68.645 v1(210.501,68.645)
  Bottom Layer w0.25: J6.34 187.718,82.412 J5.5@187.718,67.417 ; J4.1 v1(210.501,68.645) 210.501,69.404 224.155,83.058 224.155,86.36 225.372,87.577 J6.1
VSYNC: J4.25 J6.25 | length 35.7
  Bottom Layer w0.15: J6.25 196.43,86.4 196.43,76.493 198.501,74.422 J4.25
pads on no net: J2.23 J4.MP1 J4.MP2 J5.MP1 J5.MP2 J6.36

## Polygon pours and split planes (outlines as drawn)
GND on Bottom Layer "GND_L02_P000" (solid, remove dead copper, pour order 0): 178.308,91.44 178.308,20.32 228.727,20.32 228.727,91.44

## Other copper
Bottom Layer:
  pour cut-out: 196.342,54.229 196.396,54.175 210.584,54.175 210.584,69.16 224.318,82.895 218.533,88.68 189.243,88.68 189.243,80.505 196.723,73.025 196.342,72.644

## Silkscreen, mask and mechanical layers (free items; w line width, h text height)
Top Overlay:
  circle w0.254: c203.566,65.016 r17.5
  circle w0.254: c109.971,76.435 r17.5
  lines w0.1: 106.411,58.928 113.411,58.928
  lines w0.2: 109.18,58.953 106.426,58.953 106.426,48.883 113.411,48.883 113.411,59.043 111.847,59.043 ; 111.847,48.883 103.719,48.883 103.719,51.931 113.411,51.931 ; 200.021,37.463 200.021,47.534 ; 207.006,40.511 197.314,40.511 197.314,37.463 207.006,37.463 207.006,47.623
  lines w0.254: 178.308,20.32 228.727,20.32 228.727,91.44 178.308,91.44 178.308,20.32
  text "KNOB_V1.0" at 105.822,64.408 h1.52
  text "23  24" at 183.578,53.604 h1.52
  text "ELVSS" at 207.201,42.799 h1.2
  text "1    2" at 183.896,42.23 h1.52
  text "GND" at 207.201,41.402 h1.2
  text "3.3V" at 207.137,39.243 h1.2
  text "ELVDD" at 207.103,37.973 h1.2
  text "30   1" at 197.165,36.767 h1.52 r90
  text "TP_INT" at 194.183,31.623 h1.52 r90
  text "TP_SDA" at 196.723,31.623 h1.52 r90
  text "TP_SCL" at 199.263,31.623 h1.52 r90
  text "TP_RES" at 201.803,31.623 h1.52 r90
  text "RST" at 204.343,31.623 h1.52 r90
  text "CLK_N" at 206.883,31.623 h1.2 r90
  text "CLK_P" at 209.423,31.623 h1.52 r90
  text "DON_N" at 211.963,31.623 h1.52 r90
  text "DON_P" at 214.503,31.623 h1.52 r90
  text "GND" at 192.532,25.527 h1.52 r270
  text "3.3V" at 195.072,25.527 h1.52 r270
  text "SWIRE" at 197.612,25.527 h1.52 r270
  text "CSX" at 200.152,25.527 h1.52 r270
  text "SCKS" at 202.692,25.527 h1.52 r270
  text "DCX" at 205.232,25.527 h1.52 r270
  text "MOSI" at 207.772,25.527 h1.52 r270
  text "MISO" at 210.312,25.527 h1.52 r270
  text "DSI_TE" at 212.852,25.527 h1.52 r270
  text "LBY" at 181.145,20.86 h2 r90
Bottom Overlay:
  lines w0.2: 106.379,55.671 106.379,67.045 ; 113.411,63.997 103.712,63.997 103.712,67.045 113.673,67.045 113.673,55.671
Mechanical 1:
  lines w0.2: 106.426,59.631 106.426,63.119 113.538,63.119 113.538,59.686
  lines w0.254: 102.097,56.837 ccw(c103.367,59.631) 106.436,59.631 ; 102.328,56.754 cw(c109.937,76.327) 117.887,56.89 ; 113.551,59.686 ccw(c116.62,59.686) 117.89,56.892

## Text inside footprints (layer, text, board x,y; h text height)
J1: Top Overlay "18" at 215.471,29.348 h1.02; Top Overlay "17" at 215.471,26.648 h1.02; Top Overlay "2" at 190.991,29.348 h1.02; Top Overlay "1" at 191.291,26.648 h1.02
J4: Bottom Overlay "1" at 211.351,53.787 h1.02; Bottom Overlay "30" at 195.451,53.787 h1.02
J5: Bottom Overlay "6" at 186.685,67.377 h1.02; Bottom Overlay "1" at 190.585,67.377 h1.02
J6: Bottom Overlay "2" at 226.702,85.868 h1.02 r180; Bottom Overlay "1" at 226.702,88.468 h1.02 r180; Bottom Overlay "36" at 179.072,85.868 h1.02 r180; Bottom Overlay "35" at 179.072,88.468 h1.02 r180